# Altium PCB hero gimbal pcb.PcbDoc
Units mil, origin at the board's own origin, x right, y up, seen from the top; angles counter-clockwise.
Board outline 2559.06 x 1968.5 mil, 2 copper layers (Top Layer, Bottom Layer); 13 components, 14 nets, 60 pads, 0 vias.
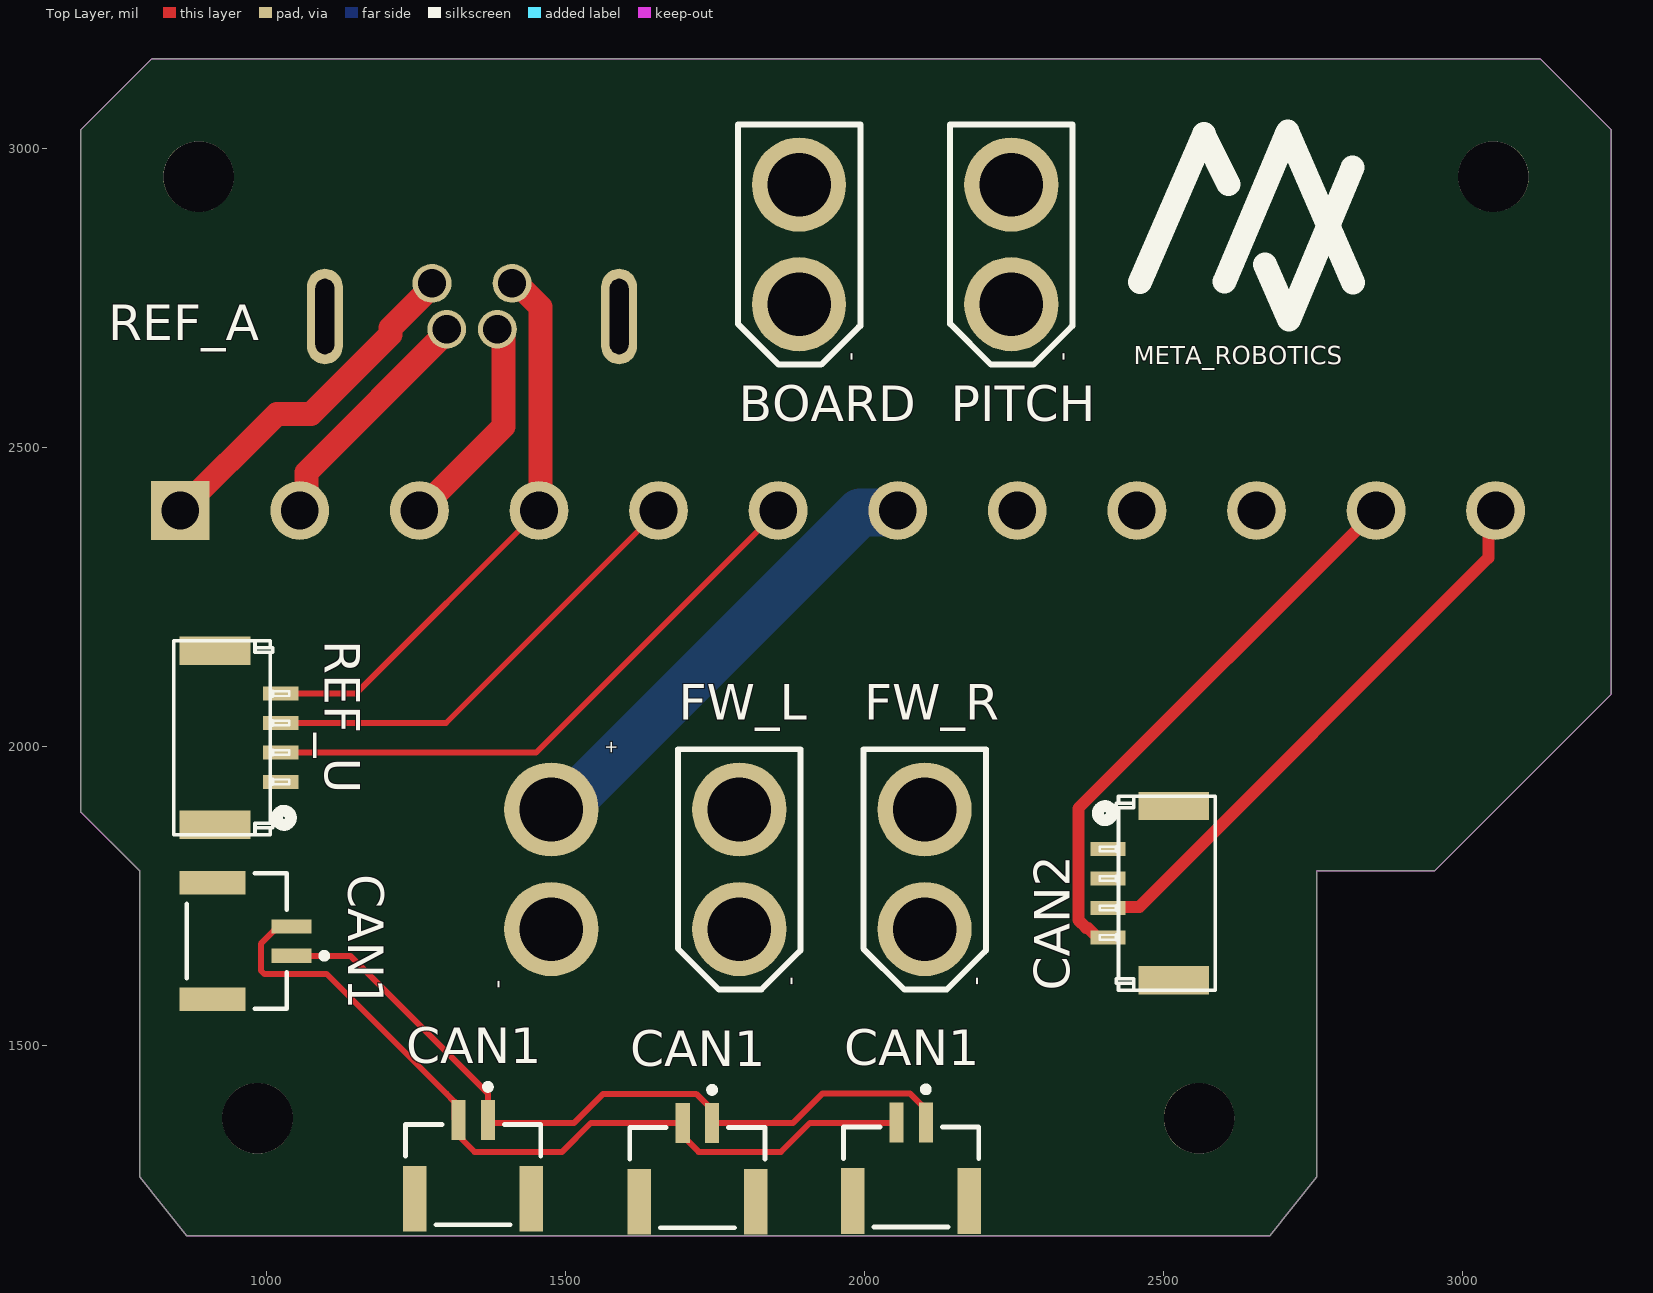
[diagram p0: Top Layer view]
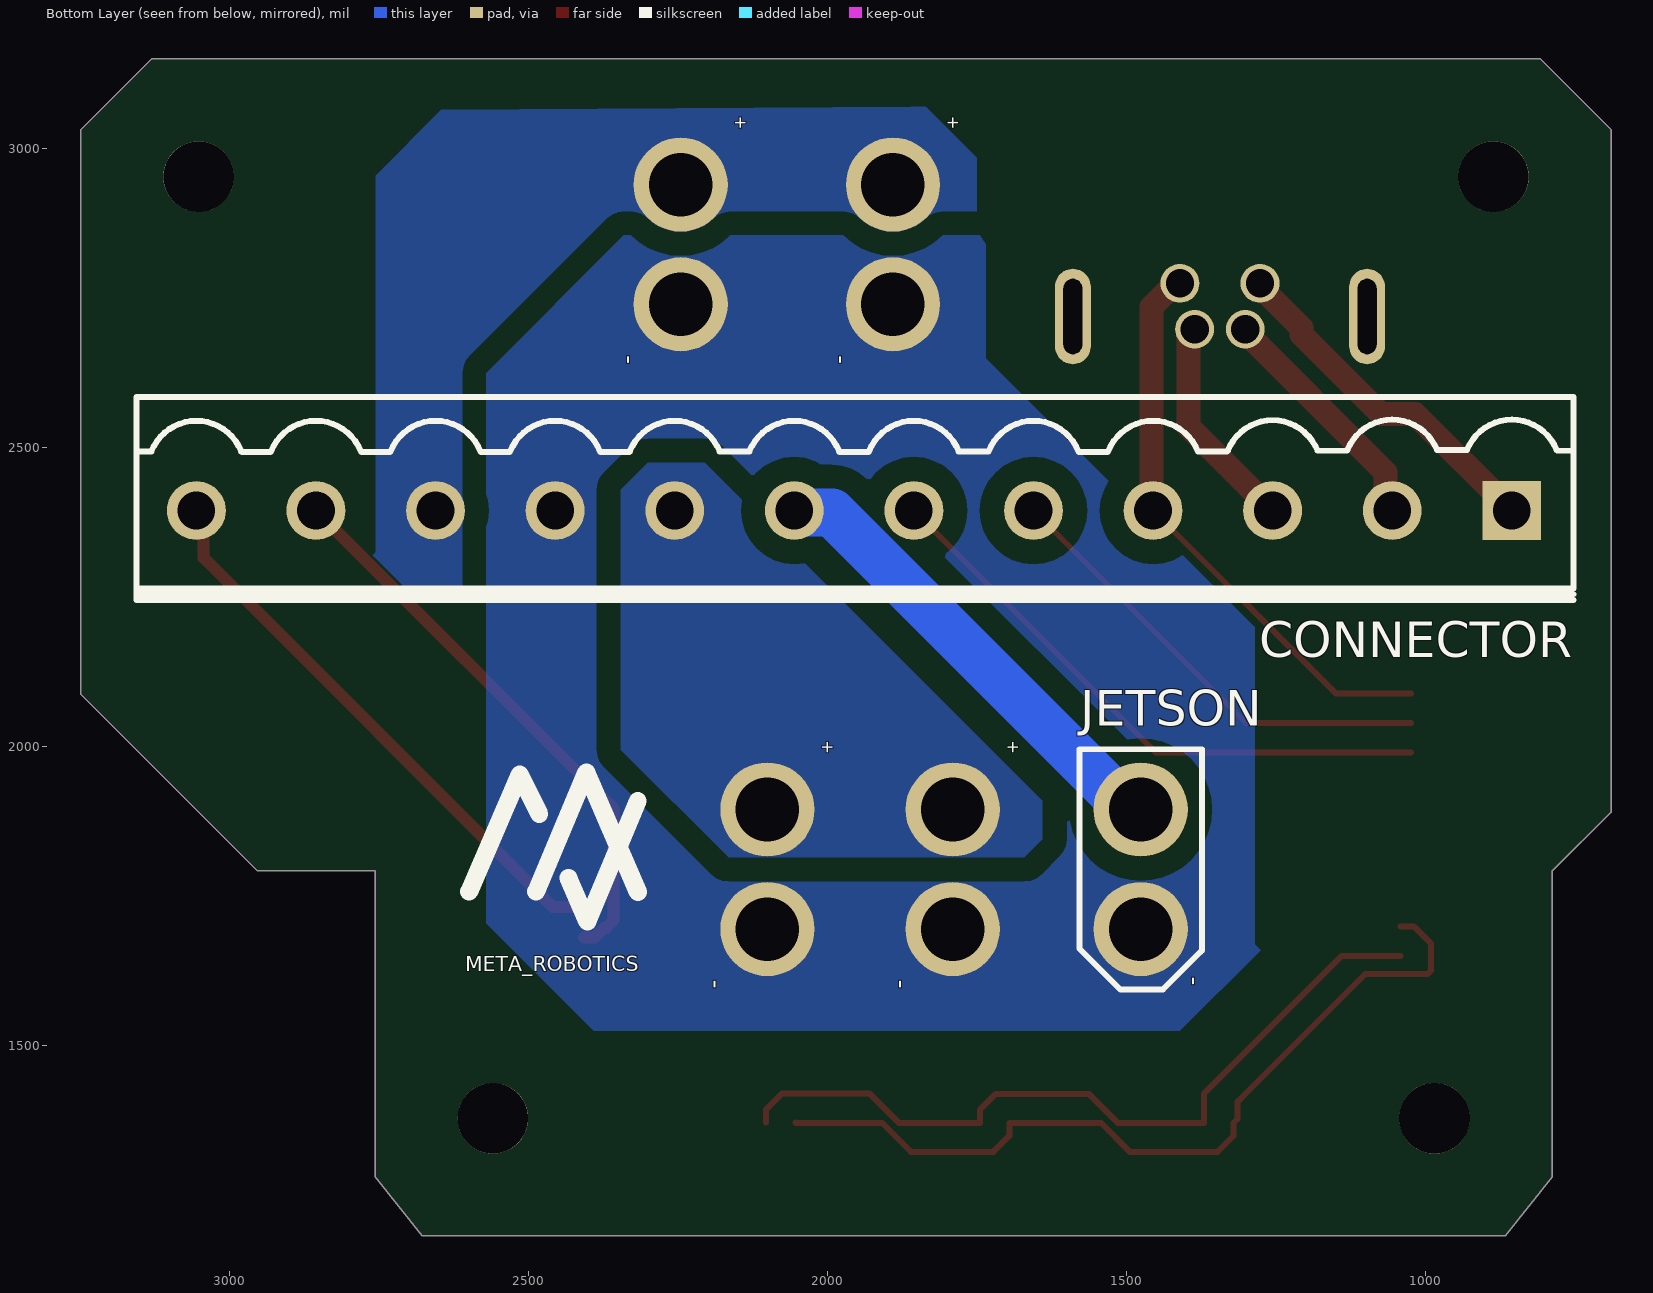
[diagram p1: Bottom Layer view, seen from below]

## Layer stack, top to bottom
Top Solder: solder mask 0.4, Solder Resist, Dk 3.5
Top Layer: signal copper 1.4
Dielectric 1: dielectric 12.6, FR-4, Dk 4.8
Bottom Layer: signal copper 1.4
Bottom Solder: solder mask 0.4, Solder Resist, Dk 3.5

## Board outline
866.14,1181.79 787.4,1280.71 787.4,1792.19 688.98,1890.61 688.98,3032.19 807.09,3150.3 3129.92,3150.3 3248.03,3032.19 3248.03,2087.46 2952.76,1792.19 2755.91,1792.19 2755.91,1280.71 2677.17,1181.79

## Design rules (kind name [scope] priority, off if disabled: settings)
Clearance Clearance_p [InPolygon] p1: gap=40 ignorepadtopadclearanceinfootprint=FALSE
PlaneClearance [All] p1: clearance=80
PolygonConnect [All] p1: connectstyle=Direct reliefconductorwidth=10 reliefentries=4 polygonreliefangle="90 Angle" airgapwidth=10
RoutingVias [All] p1: holewidth=28 width=50 viastyle="Through Hole" minholewidth=28 minwidth=50 maxholewidth=28 maxwidth=50
SolderMaskExpansion [All] p1: expansion=4 istentingtop=FALSE
Width [All] p1: maxlimit=80 minlimit=10 preferedwidth=20
29 further rules are at their usual default settings.

## Classes and differential pairs
component class Schematic: BOARD CAN1 CAN2 CONNECTOR FW_L FW_R JETSON PITCH REF_A REF_U

## Components (designator, comment, footprint, x,y, rotation, side; value= is the part's Value field where it differs from the comment)
BOARD "XT PLUGIN" XT30-M 1890,2840 r270 top
CAN1 "CAN1" JST-BM02B-GHS-TBT_V 2077.44,1305.94 r180 top
CAN1 "CAN1" JST-BM02B-GHS-TBT_V 1720,1305 r180 top
CAN1 "CAN1" JST-BM02B-GHS-TBT_V 975,1675 r90 top
CAN1 "CAN1" JST-BM02B-GHS-TBT_V 1345,1310 r180 top
CAN2 "gh1.25_4p" GH1.25-LS-4P 2505,1755 r90 top
CONNECTOR "HDR-1X12" KF2EDGK5.08-LI-12P 1955,2395 r0 bottom
FW_L "XT PLUGIN" XT30-M 1790,1795 r270 top
FW_R "XT PLUGIN" XT30-M 2100,1795 r270 top
JETSON "XT PLUGIN" XT30-M 1475.67,1795 r270 bottom
PITCH "XT PLUGIN" XT30-M 2245,2840 r270 top
REF_A "Referee_Air" "M8 Connector" 1343.07,2737.6 r180 top
REF_U "gh1.25_4p" GH1.25-LS-4P 925,2015 r270 top

## Footprints (in the part's own frame and the unit in brackets; to place one, negate y for a bottom-side part, rotate by r counter-clockwise, add the part's x,y. Pads: shape width x height; smd on the part's side, far side on the other; paste and mask are expansions set on the pad)
GH1.25-LS-4P [mm] "A1257WR-S-4P"
  rect 1.2x3 smd: 0(-3.7,-0.3) 0(3.7,-0.3)
  rect 0.6x1.5 smd: 1(1.875,2.5) 2(0.625,2.5) 3(-0.625,2.5) 4(-1.875,2.5)
  silkscreen extent -4.13,-2.05 4.12,2.93, body extent -4.12,-2.15 4.12,2.25, height 4.2
JST-BM02B-GHS-TBT_V [mm] "Connector, 2-Leads, Body 5.75x4.25mm, Pitch 1.25mm"
  rect 0.6x1.7 smd: 1(-0.625,-1.675) 2(0.625,-1.675)
  rect 1x2.8 smd: MP1(-2.475,1.675) MP2(2.475,1.675)
  silkscreen extent -2.88,-3.2 2.88,2.78, body extent -2.88,-2.17 2.87,2.78, height 4.21
KF2EDGK5.08-LI-12P [mm] "立插端子"
  rect 2.5x2.5 hole 1.6: 1(-27.94,0)
  round 2.5 hole 1.6: 2(-22.86,0) 3(-17.78,0) 4(-12.7,0) 5(-7.62,0) 6(-2.54,0) 7(2.54,0) 8(7.62,0) 9(12.7,0) 10(17.78,0) 11(22.86,0) 12(27.94,0)
  silkscreen extent -30.56,-4.83 30.48,3.81, body extent -30.48,-4.75 30.48,3.75, height 11.25
"M8 Connector" [mm]
  round 1.65 hole 1.2: 0(-1.075,1) 1(1.075,1) 2(-1.7,-0.95) 3(1.7,-0.95)
  oval 1.524x4.064 hole 0.8 slot 3.2 at 90 deg: 4(-6.25,0.46) 5(6.25,0.46)
  body extent -6.25,-19.34 6.25,1.96, height 11.3
XT30-M [mm]
  round 4 hole 2.7: 1(-2.54,0) 2(2.54,0)
  silkscreen extent -5.1,-2.6 5.11,2.6, body extent -5.18,-2.8 5.02,2.8, height 10.66

## Part data
CAN1 CAN1 CAN1 CAN1: library part CMP-2000-05957-1, "Disconnectable Crimp Style Connector, Pitch 1.25 mm, 1 x 2 Position, Height 4.05 mm, -25 to 85 degC, RoHS, Tape and Reel", Color=Natural, Manufacturer=JST-Sales-America-Inc., Package Description="Disconnectable Crimp Style Connector, Pitch 1.25 mm, 1 x 2 Position, Height 4.05 mm", Package Reference=BM02B-GHS-TBT, Category=Connectors,Interconnects, Connector Type=Header,Shrouded, Contact Finish=Tin, Contact Finish Thickness=-, Contact Mating Length=-, Contact Type=OuterShroudContact, Datasheet URL=http://www.jst-mfg.com/product/pdf/eng/eGH.pdf, Datasheet Version=05/2016, Family=RectangularConnectors-Headers,MalePins, Fastening Type=LockingRamp, Features=SolderRetention, Manufacturer URL=http://www.jst.com/home2.html, Mounting Technology=SurfaceMount, Mounting Type=SurfaceMount, Number of Positions=2, Number of Positions Loaded=All, Number of Rows=1, Packaging=Digi-Reel®, Pitch="0.049\"(1.25mm)", Row Spacing=-, Series=GH, Termination=Solder
CONNECTOR: library part "Header 12", "12P接插件", BOM名称=12P接插件, 学习资源=https://shop463601444.taobao.com, 版权归属="封装库来自淘宝卖家 ID：黄晶宝石"

## Free pads (board coordinates)
  round 118.11 hole 118.11: ""(885.83,2953.45) ""(984.25,1378.64) ""(2559.06,1378.64) ""(3051.18,2953.45)

## Nets (pads, with @x,y where several pads share a name; then routed paths per layer and width w, separated by ;. In a path a pad name is that pad's centre, name@x,y a point inside that pad or via, vN(x,y) a via of type N, cw(c..) or ccw(c..) an arc to the next point about the centre after c; other vN are vias at no path point)
AMMO_DC: CONNECTOR.8 FW_L.1 FW_R.1
CAN1_H: CAN1.2 | length 1398.8
  Top Layer w10: CAN1.2@1040.94,1699.61 1019.29,1699.61 990,1670.32 990,1625.86 995.86,1620 1100,1620 1300,1420 1313.58,1406.41 1313.58,1377.76 1320.39,1370.94 1320.39,1349.29 1347.2,1322.48 1493.66,1322.48 1542.13,1370.94 1695.39,1370.94 1695.39,1349.29 1722.2,1322.48 1859.88,1322.48 1908.35,1370.94 2051.89,1370.94 CAN1.2@2052.83,1371.89
CAN1_L: CAN1.1 | length 1311.9
  Top Layer w10: CAN1.1@1040.94,1650.39 1139.61,1650.39 1369.61,1420.39 1369.61,1370.94 1513.84,1370.94 1562.31,1419.41 1717.8,1419.41 1744.61,1392.6 1744.61,1370.94 1880.06,1370.94 1929.47,1420.35 2075.24,1420.35 2102.05,1393.54 CAN1.1@2102.05,1371.89
CAN2_H: CAN2.3 CONNECTOR.12 | length 963
  Top Layer w20: CAN2.3 2408.39,1732.2 2459.31,1732.2 3042.89,2315.79 3042.89,2382.9 CONNECTOR.12
CAN2_L: CAN2.4 CONNECTOR.11 | length 952.5
  Top Layer w20: CAN2.4 2388.86,1681.18 2372.91,1697.13 2370.21,1697.13 2357.05,1710.3 2357.05,1897.05 CONNECTOR.11
GIMBAL_DC: BOARD.1 CONNECTOR.10 PITCH.1
GND: BOARD.2 CONNECTOR.9 FW_L.2 FW_R.2 JETSON.2 PITCH.2
MPC_DC: CONNECTOR.7 JETSON.1 | length 786.4
  Bottom Layer w80: JETSON.1 1495.31,1895 1991.78,2391.47 2051.47,2391.47 CONNECTOR.7
REFEREE_A1: CONNECTOR.3 REF_A.0 | length 366.4
  Top Layer w40: CONNECTOR.3 1395.39,2535.39 REF_A.0@1395.39,2703.23
REFEREE_A2: CONNECTOR.2 REF_A.1 | length 414.2
  Top Layer w40: CONNECTOR.2 1066.18,2406.18 1066.18,2458.66 REF_A.1@1310.75,2703.23
REFEREE_A3: CONNECTOR.1 REF_A.3 | length 597.2
  Top Layer w40: CONNECTOR.1 1016.72,2556.73 1074.1,2556.73 1206.61,2689.24 1206.61,2700.47 REF_A.3@1286.14,2780
REFEREE_GND: CONNECTOR.4 REF_A.2 REF_U.4 | length 960.3
  Top Layer w10: REF_U.4 1148.82,2088.82 CONNECTOR.4
  Top Layer w40: REF_A.2@1420,2780 1420,2773.25 1457.87,2735.37 1457.87,2397.87 CONNECTOR.4
REFEREE_UR: CONNECTOR.5 REF_U.3 | length 778.8
  Top Layer w10: REF_U.3 1299.61,2039.61 CONNECTOR.5
REFEREE_UT: CONNECTOR.6 REF_U.2 | length 999.2
  Top Layer w10: REF_U.2 1450.39,1990.39 CONNECTOR.6
pads on no net: CAN1.MP1 CAN1.MP2 CAN2.0 CAN2.1 CAN2.2 REF_A.4 REF_A.5 REF_U.0 REF_U.1

## Polygon pours and split planes (outlines as drawn)
AMMO_DC on Bottom Layer "AMMO_DC_L02_P002" (solid, pour order 2): 1640,1910 2205,2475 2300,2475 2345,2430 2345,1995 2165,1815 1670,1815 1640,1845
GND on Bottom Layer "GND_L02_P006" (solid, pour order 6): 1745,2855 2340,2855 2570,2625 2570,1705 2390,1525 1410,1525 1275,1660 1285,1670 1285,2200 1735,2650 1735,2840
GIMBAL_DC on Bottom Layer "GIMBAL_DC_L02_P009" (solid, pour order 9): 1860,3070 1835,3070 1750,2985 1750,2820 2050,2820 2600,2270 2710,2270 2760,2320 2755,2325 2755,2955 2645,3065
GIMBAL_DC on Bottom Layer "GIMBAL_DC_L02_P008" (solid, pour order 8): 2405,2440

## Keep-outs
Keep-Out Layer:
  the board outline again, w0.5

## Silkscreen, mask and mechanical layers (free items; w line width, h text height)
Top Overlay:
  lines w40: 2460.34,2777.42 2567.15,3024.39 2608.19,2940.63 ; 2601.43,2777.91 2707.28,3028.6 2816.11,2776.31 ; 2669.35,2806.74 2709.6,2714.3 2815.53,2968.43
  text "META_ROBOTICS" at 2450,2640 h30
Bottom Overlay:
  lines w30: 2316.36,1756.7 2402.8,1957.09 2486.88,1757.97 ; 2316.82,1909.3 2400.96,1707.44 2432.93,1780.87 ; 2481.51,1887.22 2514.11,1953.74 2598.95,1757.58
  text "META_ROBOTICS" at 2605,1624.17 h25
Mechanical 1:
  the board outline again, w0.5

## Text inside footprints (layer, text, board x,y; h text height)
BOARD: Top Overlay "-" at 1967,2660 h30 r270; Bottom Overlay "-" at 1967,2640 h30 r270; Bottom Overlay "+" at 1780.76,3032.11 h20 r270
FW_L: Top Overlay "-" at 1867,1615 h30 r270; Bottom Overlay "-" at 1867,1595 h30 r270; Bottom Overlay "+" at 1680.76,1987.11 h20 r270
FW_R: Top Overlay "-" at 2177,1615 h30 r270; Bottom Overlay "-" at 2177,1595 h30 r270; Bottom Overlay "+" at 1990.76,1987.11 h20 r270
JETSON: Top Overlay "-" at 1398.67,1595 h30 r90; Top Overlay "+" at 1584.9,1987.11 h20 r90; Bottom Overlay "-" at 1398.67,1615 h30 r90
PITCH: Top Overlay "-" at 2322,2660 h30 r270; Bottom Overlay "-" at 2322,2640 h30 r270; Bottom Overlay "+" at 2135.76,3032.11 h20 r270